# Altium PCB LM2587.PcbDoc
Units mm, origin at the board's own origin, x right, y up, seen from the top; angles counter-clockwise.
Board outline 60 x 40 mm, 2 copper layers (Top Layer, Bottom Layer); 11 components, 7 nets, 30 pads, 129 vias.
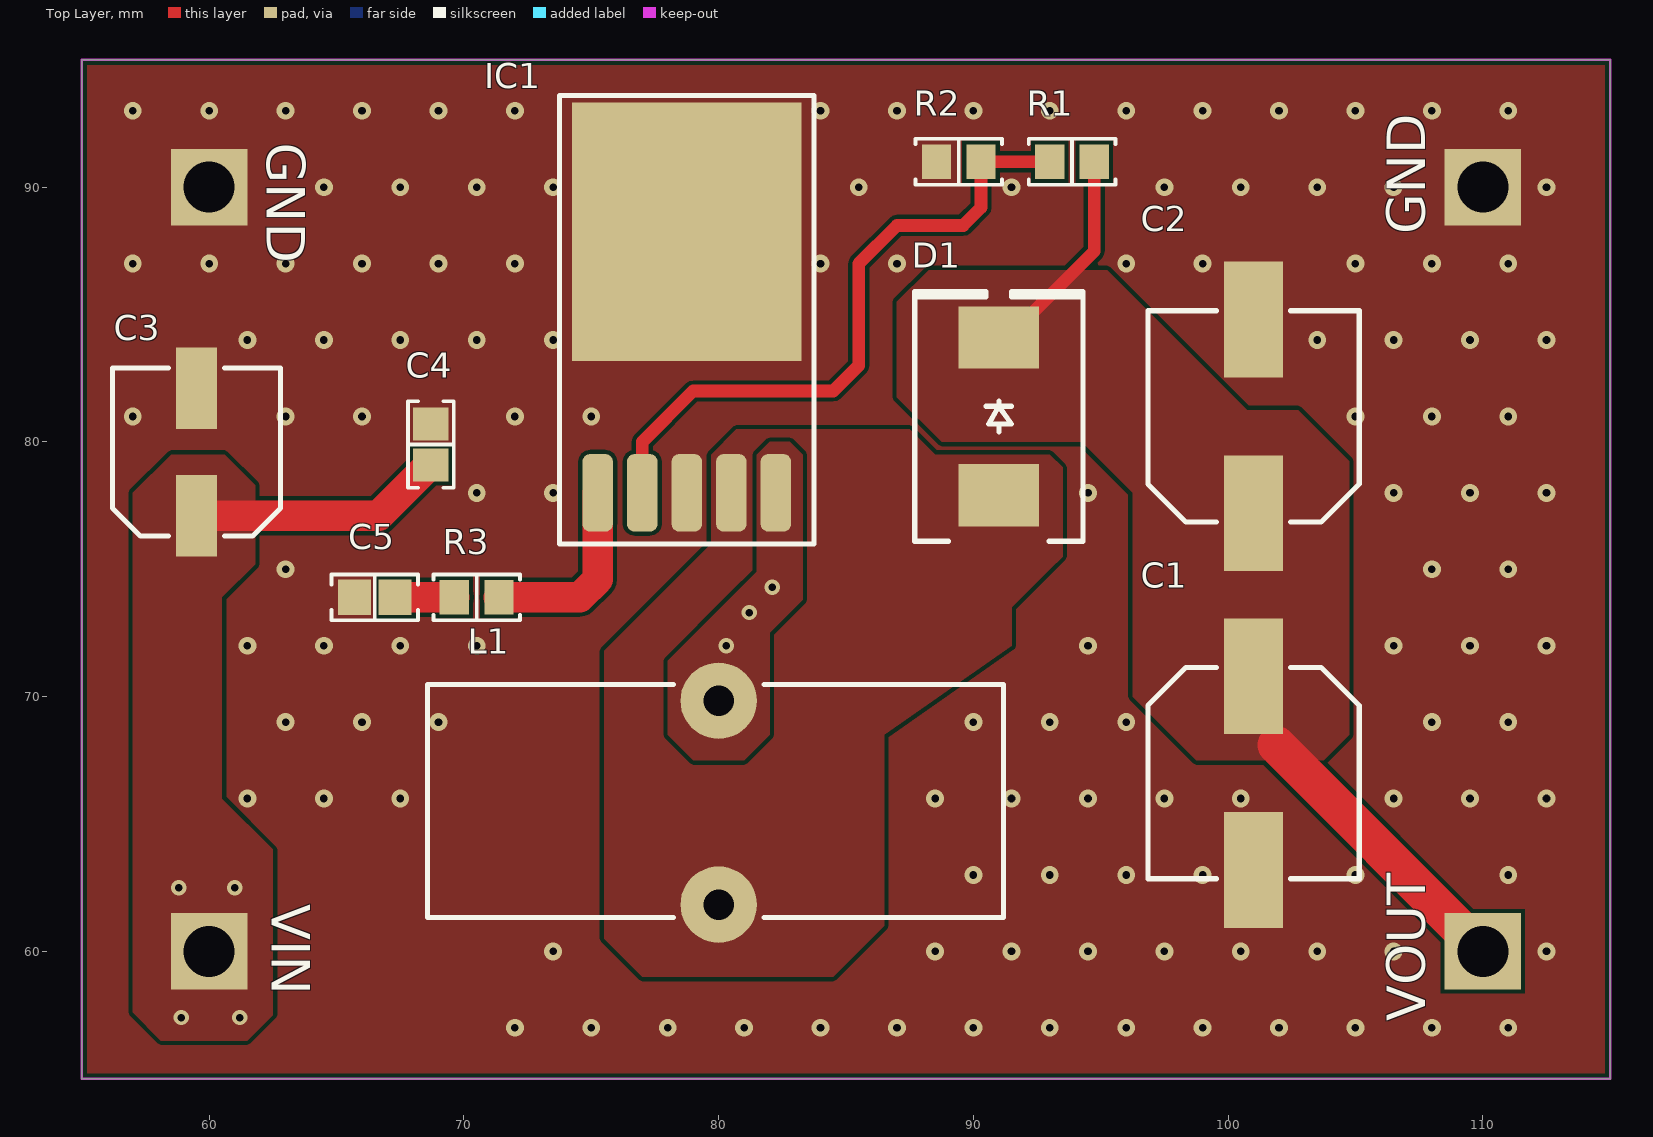
[diagram p0: Top Layer view]
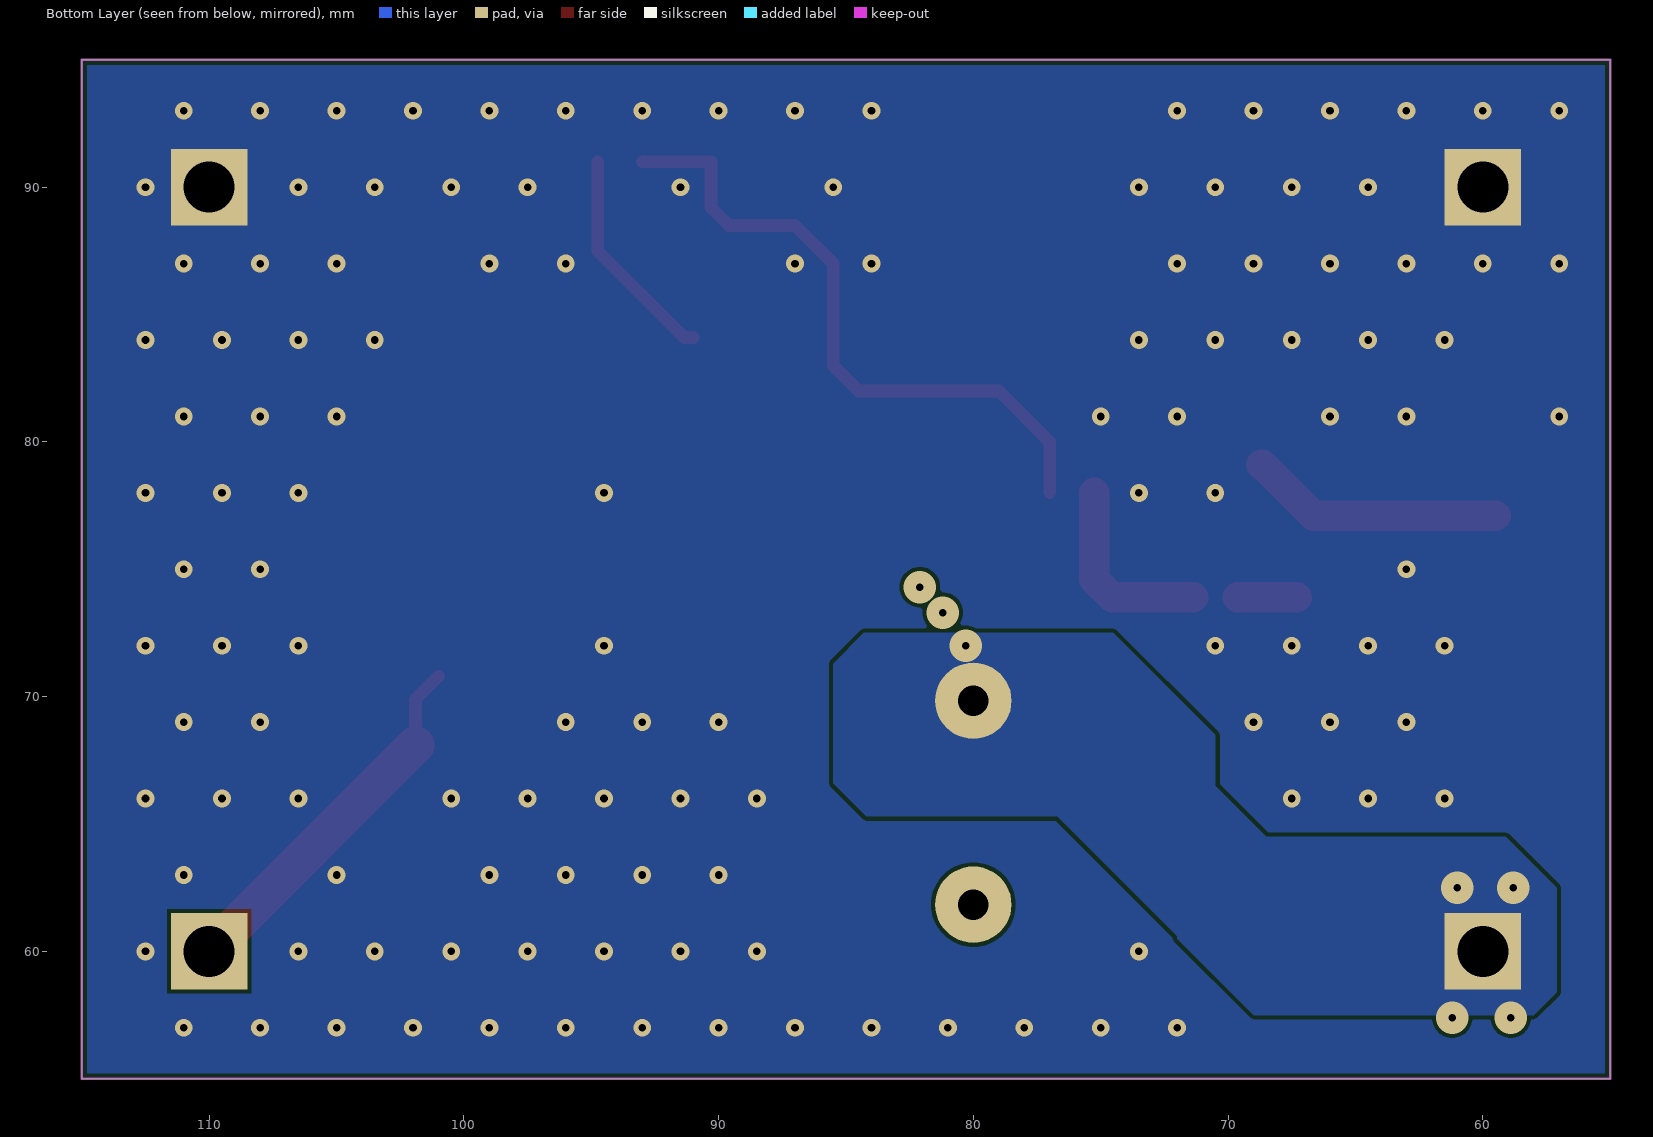
[diagram p1: Bottom Layer view, seen from below]
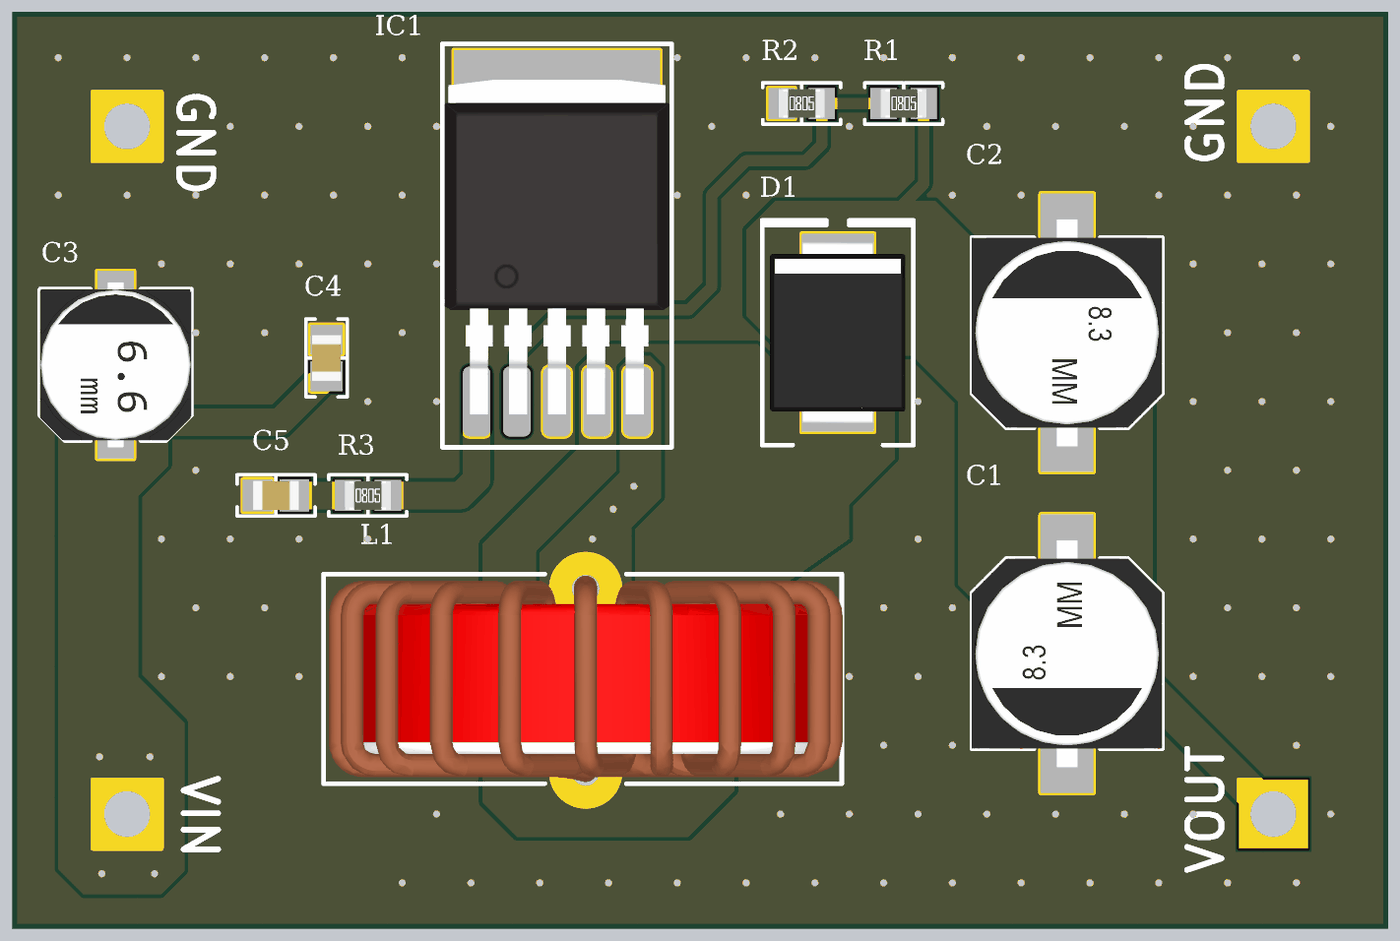
[diagram p2: 3D render of the assembled board from above, using the file's embedded part models]

## Layer stack, top to bottom
Top Solder: solder mask 0.0102, Solder Resist, Dk 3.5
Top Layer: signal copper 0.0356
Dielectric 1: dielectric 0.32, FR-4, Dk 4.8
Bottom Layer: signal copper 0.0356
Bottom Solder: solder mask 0.0102, Solder Resist, Dk 3.5

## Board outline
55,55 55,95 115,95 115,55

## Design rules (kind name [scope] priority, off if disabled: settings)
Clearance [All] p1: gap=0.152 ignorepadtopadclearanceinfootprint=FALSE
PolygonConnect [All] p1: connectstyle=Direct reliefconductorwidth=0.254 reliefentries=4 polygonreliefangle="90 Angle" airgapwidth=0.254
RoutingVias [All] p1: holewidth=0.5 width=0.8 viastyle="Through Hole" minholewidth=0.3 minwidth=0.5 maxholewidth=1 maxwidth=2
SolderMaskExpansion [All] p1: expansion=0.102 istentingtop=FALSE
Width [All] p1: maxlimit=3 minlimit=0.152 preferedwidth=0.5
30 further rules are at their usual default settings.

## Components (designator, comment, footprint, x,y, rotation, side; value= is the part's Value field where it differs from the comment)
C1 "100µF" "CAP ALSMD 8.3MM H10.5MM" 101,67 r270 top
C2 "100µF" "CAP ALSMD 8.3MM H10.5MM" 101,81 r90 top
C3 "56 µF" "CAP ALSMD 6.6MM H7.7MM" 59.5,79.6 r90 top
C4 "0.1 µF" "CAP 0805_2012" 68.7,79.9 r270 top
C5 "0.68 µF" "CAP 0805_2012" 66.5,73.9 r0 top
D1 "SURS8360T3G" "DO214AB SMC" 91,81 r90 top
IC1 "LM2587" LM2596 78.75,87 r0 top
L1 "100 µH" 7447070_inductor 80,65.9 r90 top
R1 "56 kOhms" "RES 0805_2012" 93.875,91 r0 top
R2 "2 kOhms" "RES 0805_2012" 89.425,91 r0 top
R3 "3 Ohms" "RES 0805_2012" 70.5,73.9 r0 top

## Footprints (in the part's own frame and the unit in brackets; to place one, negate y for a bottom-side part, rotate by r counter-clockwise, add the part's x,y. Pads: shape width x height; smd on the part's side, far side on the other; paste and mask are expansions set on the pad)
7447070_inductor [mm] "0.984\" Dia x 0.433\" W (25.00mm x 11.00mm)"
  round 3 hole 1.2: 1(3.937,0) 2(-4.064,0)
  silkscreen extent -4.57,-11.18 4.57,11.43, body extent -4.5,-11.21 4.5,11.21, height 23.21
"CAP 0805_2012" [mm] "Chip Capacitor, 2-Leads, Body 2.00x1.20mm, IPC Medium Density"
  rect 1.3x1.4 smd: 1(-0.8,0) 2(0.8,0)
  silkscreen extent -1.7,-0.9 1.7,0.9, body extent -1,-0.64 1,0.64, height 1.26
"CAP ALSMD 6.6MM H7.7MM" [mm] "Aluminum Electrolytic Capacitor, Body 6.60x6.60x7.70mm, IPC Low Density"
  rect 3.2x1.6 smd: 1(-2.5,0) 2(2.5,0)
  silkscreen extent -3.3,-3.3 3.3,3.3, body extent -3.6,-3.3 3.6,3.3, height 7.7
"CAP ALSMD 8.3MM H10.5MM" [mm] "Aluminum Electrolytic Capacitor, Body 8.30x8.30x10.50mm, IPC Low Density"
  rect 4.55x2.3 smd: 1(-3.8,0) 2(3.8,0)
  silkscreen extent -4.15,-4.15 4.15,4.15, body extent -4.95,-4.15 4.95,4.15, height 10.5
"DO214AB SMC" [mm] "Molded Diode, 2-Leads, Body 6.85x5.90mm, IPC Medium Density"
  rect 2.45x3.15 smd: 1(-3.1,0) 2(3.1,0)
  silkscreen extent -4.9,-3.3 4.9,3.3, body extent -3.97,-2.95 3.97,2.95, height 2.6
LM2596 [mm] "DC-DC BUCK/D2PAK"
  rrect50% 1.2x3.05 smd: 1(-3.5,-9) 2(-1.75,-9) 3(0,-9) 4(1.75,-9) 5(3.5,-9)
  rect 9x10.16 smd: 3(0,1.25)
  silkscreen extent -5,-11 5,6.6, body extent -4.91,-9.56 4.91,5.04, height 4.22
"RES 0805_2012" [mm] "Chip Resistor, 2-Leads, Body 2.00x1.25mm, IPC Medium Density"
  rect 1.15x1.35 smd: 1(-0.875,0) 2(0.875,0)
  silkscreen extent -1.7,-0.9 1.7,0.9, body extent -1,-0.62 1,0.63, height 0.6

## Part data
C1 C2: library part EEE-FK1H101P, "CAP ALUM 100UF 20% 50V SMD", Device Package="Radial, Can - SMD", Lifetime @ Temp.="2000 Hrs @ 105°C", Manufacturer="Panasonic Electronic Components", Operating Temperature="-55°C ~ 105°C", Ratings=AEC-Q200, Ripple Current @ High Frequency="350mA @ 100kHz", Ripple Current @ Low Frequency="262.5mA @ 120Hz", Supplier Part Number 1=PCE3809CT-ND, Tolerance=±20%, Voltage - Rated=50V, Applications=Automotive, Capacitance=100µF, ComponentLink2Description="DigiKey Link", ComponentLink2URL=http://digikey.com/product-detail/en/panasonic-electronic-components/EEE-FK1H101P/PCE3809CT-ND/766185, Height - Seated (Max)="0.413\" (10.50mm)", LastUpdated="2.09.2020 01:25:16", Lifecycle Status=Active, Minimum Order=1, Mounting Type="Surface Mount", Package / Case="Radial, Can - SMD", Packaging=TapeAndReel, Part Number=EEE-FK1H101P, Part Status=Active, PartId=7485, Polarization=Polar, Price=0.25, Series=FK, Size / Dimension="0.315\" Dia (8.00mm)", Supplier 1=DigiKey, Surface Mount Land Size="0.327\" L x 0.327\" W (8.30mm x 8.30mm)", Impedance="340 mOhms"
C3: library part UUD1V560MCL1GS, "CAP ALUM 56UF 20% 35V SMD", Device Package="Radial, Can - SMD", Lifetime @ Temp.="2000 Hrs @ 105°C", Manufacturer=Nichicon, Operating Temperature="-55°C ~ 105°C", Ratings=AEC-Q200, Ripple Current @ High Frequency="280 mA @ 100 kHz", Ripple Current @ Low Frequency="140 mA @ 120 Hz", Supplier Part Number 1=493-2288-1-ND, Tolerance=±20%, Voltage - Rated="35 V", Applications=Automotive, Capacitance="56 µF", ComponentLink1Description=Datasheet, ComponentLink1URL=http://nichicon-us.com/english/products/pdfs/e-uud.pdf, ComponentLink2Description="DigiKey Link", ComponentLink2URL=https://www.digikey.com/en/products/detail/nichicon/UUD1V560MCL1GS/590029, Height - Seated (Max)="0.303\" (7.70mm)", LastUpdated="23.05.2022 13:47:38", Lifecycle Status=Active, Minimum Order=1, Mounting Type="Surface Mount", Package / Case="Radial, Can - SMD", Packaging=TapeAndReel, Part Number=UUD1V560MCL1GS, Part Status=Active, PartId=27263, Polarization=Polar, Price=0.17, Series=UUD, Size / Dimension="0.248\" Dia (6.30mm)", Supplier 1=DigiKey, Surface Mount Land Size="0.260\" L x 0.260\" W (6.60mm x 6.60mm)", Impedance="340 mOhms"
C4: library part 0805B104J500CT, "CAP CER 0.1UF 50V X7R 0805", Device Package="0805 (2012 Metric)", Manufacturer="Walsin Technology Corporation", Operating Temperature="-55°C ~ 125°C", Supplier Part Number 1=1292-1564-1-ND, Temperature Coefficient=X7R, Tolerance=±5%, Voltage - Rated=50V, Applications="General Purpose", Capacitance="0.1 µF", ComponentLink1Description=Datasheet, ComponentLink1URL=http://www.passivecomponent.com/wp-content/uploads/2018/10/MLCC.pdf, ComponentLink2Description="DigiKey Link", ComponentLink2URL=https://www.digikey.com/en/products/detail/walsin-technology-corporation/0805B104J500CT/9355061, LastUpdated="23.05.2022 12:57:36", Lifecycle Status=Active, Minimum Order=1, Mounting Type="Surface Mount, MLCC", Package / Case="0805 (2012 Metric)", Packaging=TapeAndReel, Part Number=0805B104J500CT, Part Status=Active, PartId=15418, Price=0.02, Series=-, Size / Dimension="0.079\" L x 0.049\" W (2.00mm x 1.25mm)", Supplier 1=DigiKey, Thickness (Max)="0.035\" (0.90mm)"
C5: library part C0805C684K5RACAUTO7210, "CAP CER 0.68UF 50V X7R 0805", Device Package="0805 (2012 Metric)", Manufacturer=KEMET, Operating Temperature="-55°C ~ 125°C", Ratings=AEC-Q200, Supplier Part Number 1=399-C0805C684K5RACAUTO7210CT-ND, Temperature Coefficient=X7R, Tolerance=±10%, Voltage - Rated=50V, Applications="Automotive, Bypass, Decoupling", Capacitance="0.68 µF", ComponentLink1Description=Datasheet, ComponentLink1URL=https://api.kemet.com/component-edge/download/datasheet/C0805C684K5RACAUTO7210.pdf, ComponentLink2Description="DigiKey Link", ComponentLink2URL=https://www.digikey.com/en/products/detail/kemet/C0805C684K5RACAUTO7210/11676953, LastUpdated="23.05.2022 12:57:14", Lifecycle Status=Active, Minimum Order=1, Mounting Type="Surface Mount, MLCC", Package / Case="0805 (2012 Metric)", Packaging=TapeAndReel, Part Number=C0805C684K5RACAUTO7210, Part Status=Active, PartId=32222, Price=0.05, Series="SMD Auto X7R", Size / Dimension="0.079\" L x 0.049\" W (2.00mm x 1.25mm)", Supplier 1=DigiKey, Thickness (Max)="0.057\" (1.45mm)"
D1: "DIODE GEN PURP 600V 3A SMC", Current - Average Rectified (Io)=3A, Current - Reverse Leakage @ Vr="10µA @ 600V", Manufacturer="ON Semiconductor", Operating Temperature - Junction="-65°C ~ 175°C", Package / Case="DO-214AB, SMC", Supplier Device Package=SMC, Supplier Part Number 1=SURS8360T3GOSCT-ND, Voltage - DC Reverse (Vr) (Max)=600V, Voltage - Forward (Vf) (Max) @ If="1.25V @ 3A", ComponentLink1Description=Datasheet, ComponentLink1URL=http://www.onsemi.com/pub/Collateral/MURS320T3-D.PDF, ComponentLink2Description="DigiKey Link", ComponentLink2URL=http://digikey.com/product-detail/en/on-semiconductor/SURS8360T3G/SURS8360T3GOSCT-ND/9087771, Diode Type=Standard, LastUpdated="23.05.2022 13:35:53", Lifecycle Status=Active, Minimum Order=1, Mounting Type="Surface Mount", Packaging=TapeAndReel, Part Number=SURS8360T3G, Part Status=Active, PartId=348, Price=0.30, Reverse Recovery Time (trr)=75ns, Series=-, Speed="Fast Recovery =< 500ns, > 200mA (Io)", Supplier 1=DigiKey
IC1: "Boost Converter"
L1: library part SRR1280-101M, "FIXED IND 100UH 2.1A 150MOHM SMD", Current - Saturation=2A, Current Rating (Amps)="2.1 A", DC Resistance (DCR)="150mOhm Max", Device Package=Nonstandard, Frequency - Self Resonant=4.5MHz, Manufacturer="Bourns Inc.", Operating Temperature="-40°C ~ 125°C", Q @ Freq="18 @ 796kHz", Supplier Part Number 1=SRR1280-101MCT-ND, Tolerance=±20%, Inductance Frequency - Test="100 kHz", ComponentLink1Description=Datasheet, ComponentLink1URL=https://www.bourns.com/docs/Product-Datasheets/SRR1280.pdf, ComponentLink2Description="DigiKey Link", ComponentLink2URL=https://www.digikey.com/en/products/detail/bourns-inc/SRR1280-101M/2127044, Height - Seated (Max)="0.315\" (8.00mm)", LastUpdated="23.05.2022 13:40:12", Lifecycle Status=Active, Material - Core=Ferrite, Minimum Order=1, Mounting Type="Surface Mount", Package / Case=Nonstandard, Packaging=TapeAndReel, Part Number=SRR1280-101M, Part Status=Active, PartId=24, Price=0.57, Series=SRR1280, Shielding=Shielded, Size / Dimension="0.492\" L x 0.492\" W (12.50mm x 12.50mm)", Supplier 1=DigiKey, Type=Wirewound, Inductance="100 µH"
R1: library part RMCF0805FT56K0, "RES 56K OHM 1% 1/8W 0805", Device Package="0805 (2012 Metric)", Manufacturer="Stackpole Electronics Inc", Operating Temperature="-55°C ~ 155°C", Power (Watts)="0.125W, 1/8W", Ratings=AEC-Q200, Supplier Device Package=0805, Supplier Part Number 1=RMCF0805FT56K0CT-ND, Temperature Coefficient=±100ppm/°C, Tolerance=±1%, ComponentLink1Description=Datasheet, ComponentLink1URL=https://www.seielect.com/catalog/sei-packaging.pdf, ComponentLink2Description="DigiKey Link", ComponentLink2URL=https://www.digikey.com/en/products/detail/stackpole-electronics-inc/RMCF0805FT56K0/1760366, Composition="Thick Film", Features="Automotive AEC-Q200", Height - Seated (Max)="0.026\" (0.65mm)", LastUpdated="23.05.2022 13:27:55", Lifecycle Status=Active, Minimum Order=1, Number of Terminations=2, Package / Case="0805 (2012 Metric)", Packaging=CutTape, Part Number=RMCF0805FT56K0, Part Status=Active, PartId=32591, Price=0.01, Resistance="56 kOhms", Series=RMCF, Size / Dimension="0.079\" L x 0.049\" W (2.00mm x 1.25mm)", Supplier 1=DigiKey
R2: library part RCS08052K00FKEA, "RES SMD 2K OHM 1% 0.4W 0805", Device Package="0805 (2012 Metric)", Manufacturer="Vishay Dale", Operating Temperature="-55°C ~ 155°C", Power (Watts)="0.4W, 2/5W", Ratings=AEC-Q200, Supplier Device Package=0805, Supplier Part Number 1=541-2840-1-ND, Temperature Coefficient=±100ppm/°C, Tolerance=±1%, ComponentLink1Description=Datasheet, ComponentLink1URL=http://www.vishay.com/docs/20065/rcse3.pdf, ComponentLink2Description="DigiKey Link", ComponentLink2URL=https://www.digikey.com/en/products/detail/vishay-dale/RCS08052K00FKEA/5866986, Composition="Thick Film", Features="Automotive AEC-Q200, Pulse Withstanding", Height - Seated (Max)="0.020\" (0.50mm)", LastUpdated="23.05.2022 13:28:13", Lifecycle Status=Active, Minimum Order=1, Number of Terminations=2, Package / Case="0805 (2012 Metric)", Packaging=TapeAndReel, Part Number=RCS08052K00FKEA, Part Status=Active, PartId=27786, Price=0.03, Resistance="2 kOhms", Series="RCS e3", Size / Dimension="0.079\" L x 0.049\" W (2.00mm x 1.25mm)", Supplier 1=DigiKey
R3: library part ERJ-6BQF3R0V, "RES SMD 3 OHM 1% 1/3W 0805", Device Package="0805 (2012 Metric)", Manufacturer="Panasonic Electronic Components", Operating Temperature="-55°C ~ 155°C", Power (Watts)="0.333W, 1/3W", Ratings=AEC-Q200, Supplier Device Package=0805, Supplier Part Number 1=P17506CT-ND, Temperature Coefficient=±200ppm/°C, Tolerance=±1%, ComponentLink1Description=Datasheet, ComponentLink1URL=https://industrial.panasonic.com/cdbs/www-data/pdf/RDN0000/AOA0000C313.pdf, ComponentLink2Description="DigiKey Link", ComponentLink2URL=https://www.digikey.com/en/products/detail/panasonic-electronic-components/ERJ-6BQF3R0V/5647539, Composition="Thick Film", Features="Automotive AEC-Q200, Current Sense", Height - Seated (Max)="0.028\" (0.70mm)", LastUpdated="23.05.2022 13:27:31", Lifecycle Status=Active, Minimum Order=1, Number of Terminations=2, Package / Case="0805 (2012 Metric)", Packaging=TapeAndReel, Part Number=ERJ-6BQF3R0V, Part Status=Active, PartId=38851, Price=0.06, Resistance="3 Ohms", Series=ERJ-6B, Size / Dimension="0.079\" L x 0.049\" W (2.00mm x 1.25mm)", Supplier 1=DigiKey

## Free pads (board coordinates)
  rect 3x3 hole 2: GND(60,90) GND(110,90) VIN(60,60) VOUT(110,60)

## Via types
v1: diameter 0.7, hole 0.3, Top Layer to Bottom Layer, tented both sides, 122 vias
v2: diameter 0.6/1.27 (per signal layer), hole 0.3, Top Layer to Bottom Layer, tented both sides, 7 vias

## Nets (pads, with @x,y where several pads share a name; then routed paths per layer and width w, separated by ;. In a path a pad name is that pad's centre, name@x,y a point inside that pad or via, vN(x,y) a via of type N, cw(c..) or ccw(c..) an arc to the next point about the centre after c; other vN are vias at no path point)
GND: C1.2 C2.2 C3.2 C4.1 C5.1 IC1.3 pad.GND R2.1
  other v1: 72,57 75,57 78,57 81,57 84,57 87,57 90,57 93,57 96,57 99,57 102,57 105,57 108,57 111,57 73.5,60 88.5,60 91.5,60 94.5,60 97.5,60 100.5,60 103.5,60 106.5,60 112.5,60 90,63 93,63 96,63 99,63 105,63 111,63 61.5,66 64.5,66 67.5,66 88.5,66 91.5,66 94.5,66 97.5,66 100.5,66 106.5,66 109.5,66 112.5,66 63,69 66,69 69,69 90,69 93,69 96,69 108,69 111,69 61.5,72 64.5,72 67.5,72 70.5,72 94.5,72 106.5,72 109.5,72 112.5,72 63,75 108,75 111,75 70.5,78 73.5,78 94.5,78 106.5,78 109.5,78 112.5,78 57,81 63,81 66,81 72,81 75,81 105,81 108,81 111,81 61.5,84 64.5,84 67.5,84 70.5,84 73.5,84 103.5,84 106.5,84 109.5,84 112.5,84 57,87 60,87 63,87 66,87 69,87 72,87 84,87 87,87 96,87 99,87 105,87 108,87 111,87 64.5,90 67.5,90 70.5,90 73.5,90 85.5,90 91.5,90 97.5,90 100.5,90 103.5,90 106.5,90 112.5,90 57,93 60,93 63,93 66,93 69,93 72,93 84,93 87,93 90,93 93,93 96,93 99,93 102,93 105,93 108,93 111,93
NetC5_2: C5.2 R3.1 | length 2.3
  Top Layer w1.2: C5.2 R3.1
NetD1_1: D1.1 IC1.4 L1.2
NetR1_1: IC1.2 R1.1 R2.2 | length 26
  Top Layer w0.5: IC1.2 77,80 79,82 84.5,82 85.5,83 85.5,87 87,88.5 89.6,88.5 90.3,89.2 R2.2 R1.1
NetR3_2: IC1.1 R3.2 | length 7.6
  Top Layer w1.2: R3.2 74.547,73.9 75.25,74.603 IC1.1
VIN: C3.1 C4.2 IC1.5 L1.1 pad.VIN | length 10
  Top Layer w1.2: C3.1 66.65,77.1 68.65,79.1 C4.2
  other v2: 58.9,57.4 61.2,57.4 58.8,62.5 61,62.5 80.3,72 81.2,73.3 82.1,74.3
VOUT: C1.1 C2.1 D1.2 pad.VOUT R1.2 | length 23.2
  Top Layer w0.5: D1.2 91.35,84.1 94.75,87.5 R1.2 ; C1.1 101.9,69.9 101.9,68.1
  Top Layer w1.5: 101.9,68.1 pad.VOUT

## Polygon pours and split planes (outlines as drawn)
GND on Top Layer "GND_L01_P009" (solid, remove dead copper, pour order 9): 55,95 115,95 115,55 55,55
VOUT on Top Layer "VOUT" (solid, remove dead copper, pour order 0): 87,85.5 88.25,86.75 95.25,86.75 100.75,81.25 102.75,81.25 104.75,79.25 104.75,68.5 103.75,67.5 98.75,67.5 96.25,70 96.25,78 94.25,80 88.75,80 87,81.75
VIN on Top Layer "VIN_L01_P007" (solid, remove dead copper, pour order 7): 58.5,79.5 60.6,79.5 61.8,78.3 61.8,75.2 60.5,73.9 60.5,66 62.5,64 62.5,57.5 61.5,56.5 58.1,56.5 57,57.6 57,78
NetD1_1 on Top Layer "NETD1_1_L01_P005" (solid, remove dead copper, pour order 5): 82.1,80.5 82,80.5 87.5,80.5 88.5,79.5 93,79.5 93.5,79 93.5,75.5 93,75 91.5,73.5 91.5,72 86.5,68.5 86.5,61 84.5,59 77,59 75.5,60.5 75.5,71.8 79.7,76 79.7,79.5 80.7,80.5
VIN on Top Layer "VIN_L01_P002" (solid, remove dead copper, pour order 2): 81.5,79.5 82,80 82.8,80 83.3,79.5 83.3,73.8 82,72.5 82,68.5 81,67.5 79,67.5 78,68.5 78,71.4 80.6,74 81.5,74.9
GND on Bottom Layer "GND_L02_P010" (solid, remove dead copper, pour order 10): 55,95 115,95 115,55 55,55
VIN on Bottom Layer "VIN_L02_P006" (solid, remove dead copper, pour order 6): 57.1,62.5 59.1,64.5 68.5,64.5 70.5,66.5 70.5,68.5 74.5,72.5 84.3,72.5 85.5,71.3 85.5,66.6 84.2,65.3 76.7,65.3 72,60.6 72,60.5 69,57.5 58,57.5 57.1,58.4

## Keep-outs
Keep-Out Layer:
  lines w0.1: 55,55 115,55 115,65 115,85 115,95 55,95 55,55

## Silkscreen, mask and mechanical layers (free items; w line width, h text height)
Top Overlay:
  text "GND" at 62.254,91.746 h1.5 r270
  text "GND" at 107.746,88.154 h1.5 r90
  text "VIN" at 62.454,61.846 h1.5 r270
  text "VOUT" at 107.746,57.254 h1.5 r90